# EAGLE board Motor Module V1.2 (EAGLE 6.6.0)
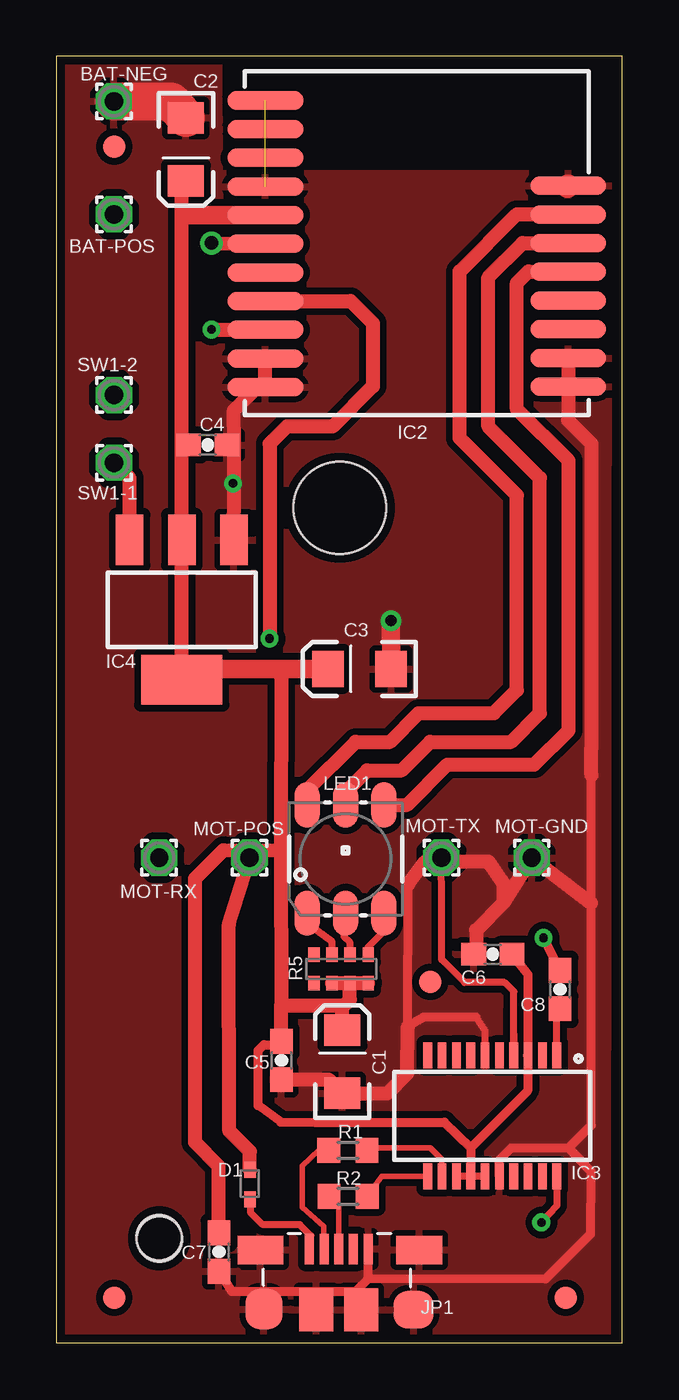
[diagram p0: board, top side]
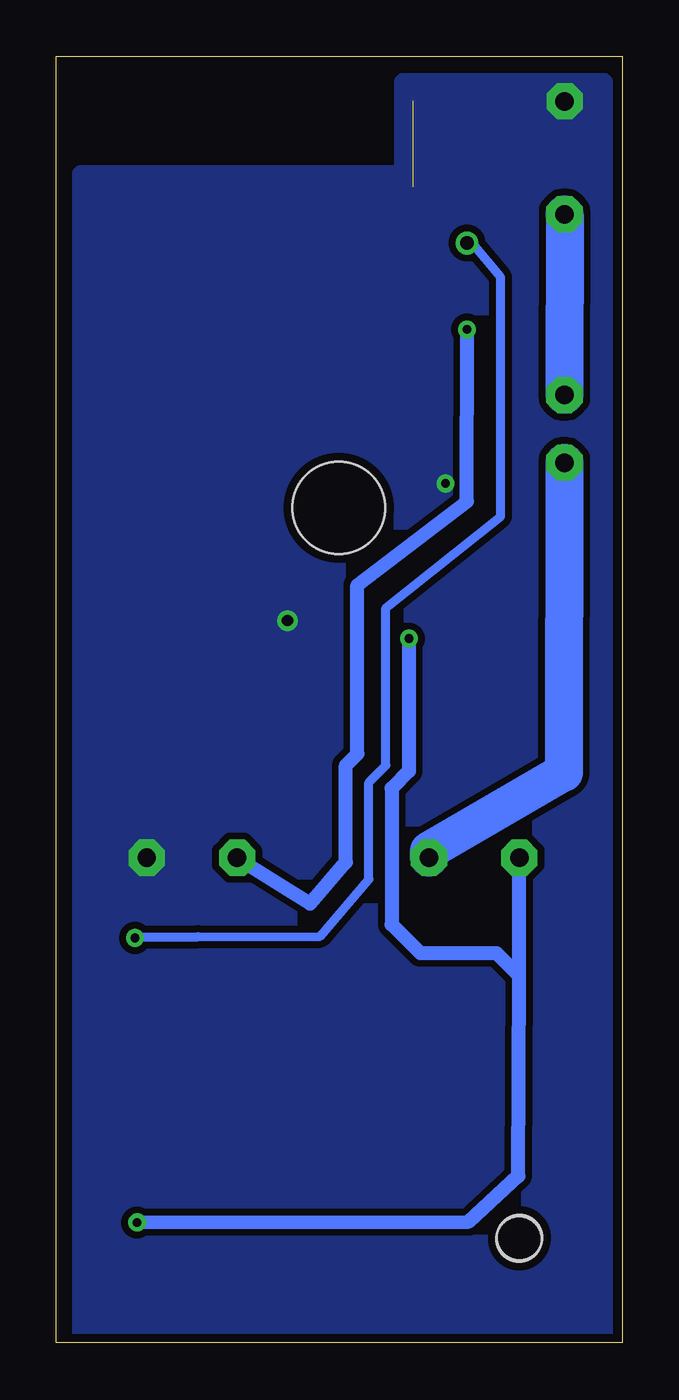
[diagram p1: board, bottom side, seen from below]

Size 25.05 x 57 mm. Coordinates in mm from the lower left corner, seen from the top.
Outline: 0,0 25.05,0 25.05,57 0,57 0,0
Copper layers (1*16): Top 0.035mm / dielectric 1.5mm / Bottom 0.035mm
Design rules "4pcb-Advanced Circuits": minimum track width 10mil, minimum drill 15mil, track to track 8mil, track to pad 8mil, pad to pad 8mil, via to via 8mil, smd to smd 8mil, copper to edge 15mil, drill to drill 8mil, minimum pad ring 10mil, minimum via ring 8mil, stop-mask expansion 4mil, vias tented up to drill 0mil, thermal gap 10mil
Holes 4.1 mm at 12.55,37
Holes 2 mm at 4.55,4.67 4.56,4.6

## Footprints (pad centres in the part's own frame; a part is rotated, then mirrored left to right if it is on the bottom)
1,6/0,8 = drill 0.813 pad 1.6 octagon: 1 0,0
EIA3216 = smd 1.4 x 1.6: A 1.4,0; C -1.4,0
0603-CAP = smd 1.1 x 1: 1 -0.85,0; 2 0.85,0
SOD523 = smd 0.7 x 0.5: A 0.7,0; C -0.6,0
FIDUCIAL-1X2 = smd 1 x 1: 1 0,0
RFD22301 = smd 3.353 x 0.813: 1 0,0; 2 0,-1.27; 3 0,-2.54; 4 0,-3.81; 5 0,-5.08; 6 0,-6.35; 7 0,-7.62; 8 0,-8.89; 9 13.411,-12.675; 10 13.411,-11.405; 11 13.411,-10.135; 12 13.411,-8.865; 13 13.411,-7.595; 14 13.411,-6.325; 15 13.411,-5.055; 16 13.411,-3.785; 17 13.411,-2.515; 18 13.411,-1.245; 19 13.411,0.025
SSOP20_L = smd 0.381 x 1.143: 1 -2.857,-2.68; 2 -2.223,-2.68; 3 -1.587,-2.68; 4 -0.953,-2.68; 5 -0.318,-2.68; 6 0.318,-2.68; 7 0.953,-2.68; 8 1.587,-2.68; 9 2.223,-2.68; 10 2.857,-2.68; 11 2.857,2.68; 12 2.223,2.68; 13 1.587,2.68; 14 0.953,2.68; 15 0.318,2.68; 16 -0.318,2.68; 17 -0.953,2.68; 18 -1.587,2.68; 19 -2.223,2.68; 20 -2.857,2.68
SOT223 = smd 1.219 x 2.235: 1 -2.311,-3.099; 2 0,-3.099; 3 2.311,-3.099 | smd 3.6 x 2.2: 4 0,3.099
USB-MICRO-MOLEX-105017-0001 = smd 0.4 x 1.35: 1 -1.34,1.27; 2 -0.69,1.27; 3 -0.04,1.27; 4 0.61,1.27; 5 1.26,1.27 | smd 2.032 x 1.27: P$1 -3.505,1.219; P$6 3.531,1.219 | smd 1.651 x 1.778: P$2 -3.353,-1.397 | smd 1.5 x 1.9: P$3 -1.04,-1.43; P$4 0.96,-1.43 | smd 1.778 x 1.651: P$5 3.277,-1.422
LED-TRICOLOR-5050 = smd 2 x 1.1: 1 -2.4,1.7; 2 -2.4,0; 3 -2.4,-1.7; 4 2.4,-1.7; 5 2.4,0; 6 2.4,1.7
R0603 = smd 1 x 1.1: 1 -0.85,0; 2 0.85,0
0603-ARV = smd 0.5 x 0.65: 1 -1.2,-0.625; 2 -0.4,-0.625; 3 0.4,-0.625; 4 1.2,-0.625; 5 1.2,0.625; 6 0.4,0.625; 7 -0.4,0.625; 8 -1.2,0.625

## Placement (x,y rotation side)
BAT-NEG  [1,6/0,8]  2.54,55.01 0 top
BAT-POS  [1,6/0,8]  2.55,50.01 0 top
C1  10uF  [EIA3216]  12.66,12.47 90 top
C2  10uF  [EIA3216]  5.73,52.88 270 top
C3  10uF  [EIA3216]  13.42,29.87 180 top
C4  0.1uF  [0603-CAP]  6.7,39.79 0 top
C5  0.1uF  [0603-CAP]  9.96,12.52 270 top
C6  0.1uF  [0603-CAP]  19.33,17.22 180 top
C7  0.1uF  [0603-CAP]  7.19,4.03 270 top
C8  0.1uF  [0603-CAP]  22.31,15.66 90 top
D1  500mA  [SOD523]  8.57,7.07 270 top
FID2  FIDUCIAL1X2  [FIDUCIAL-1X2]  22.55,2 0 top
FID3  FIDUCIAL1X2  [FIDUCIAL-1X2]  2.55,53 0 top
FID4  FIDUCIAL1X2  [FIDUCIAL-1X2]  2.55,2 0 top
FID5  FIDUCIAL1X2  [FIDUCIAL-1X2]  16.55,16 0 top
IC2  RF22301  [RFD22301]  22.67,42.37 180 top
IC3  FTS31XS-U  [SSOP20_L]  19.3,10.06 180 top
IC4  AZ1117CH-3.3TRG1  [SOT223]  5.55,32.48 180 top
JP1  USB-CON-5PIN-105017-0001  [USB-MICRO-MOLEX-105017-0001]  12.54,2.9 0 top
LED1  LED-TRICOLOR-5050NO_IC  [LED-TRICOLOR-5050]  12.8,21.44 90 top
MOT-GND  [1,6/0,8]  21.05,21.5 0 top
MOT-POS  [1,6/0,8]  8.55,21.5 0 top
MOT-RX  [1,6/0,8]  4.55,21.5 0 top
MOT-TX  [1,6/0,8]  17.05,21.5 0 top
R1  27E  [R0603]  12.91,8.54 180 top
R2  27E  [R0603]  12.91,6.5 180 top
R5  330E  [0603-ARV]  12.61,16.57 180 top
SW1-1  [1,6/0,8]  2.55,39 0 top
SW1-2  [1,6/0,8]  2.55,42 0 top

## Library data of the parts
BAT-NEG BAT-POS MOT-GND MOT-POS MOT-RX MOT-TX SW1-1 SW1-2 = wirepad
C1-C3 = SparkFun-Capacitors; PROD_ID: CAP-00811
C4-C8 = SparkFun-Capacitors; PROD_ID: CAP-08604
D1 = diode
FID2-FID5 = SparkFun-Aesthetics
IC2 JP1 = GeekAmmo
IC3 = SparkFun-DigitalIC; PROD_ID: IC-11524
IC4 = SparkFun-PowerIC; PROD_ID: VREG-08170
LED1 = SparkFun-LED
R1 R2 = resistor
R5 = SparkFun-Passives

## Nets
+5V: D1.A JP1.1
+12V: D1.C IC4.3 MOT-POS.1 SW1-1.1
BAT-POS: BAT-POS.1 SW1-2.1
D_N: JP1.2 R1.2
D_P: JP1.3 R2.2
GND: BAT-NEG.1 C1.C C2.C C3.C C4.2 C5.2 C6.2 C7.2 IC2.1 IC2.2 IC2.8 IC2.9 IC2.10 IC2.12 IC2.18 IC2.19 IC3.6 IC3.16 IC4.1 JP1.5 JP1.P$1 JP1.P$2 JP1.P$3 JP1.P$4 JP1.P$5 JP1.P$6 MOT-GND.1
LBLUE: IC2.5 LED1.4
LGREEN: IC2.7 LED1.6
LRED: IC2.6 LED1.5
N$1: C8.1 IC3.1
N$3: LED1.3 R5.1
N$5: LED1.2 R5.2
N$6: LED1.1 R5.3
RST/: C8.2 IC2.14
USB-RX: IC2.17 IC3.4 MOT-TX.1
USB-TX: IC2.16 IC3.20 MOT-RX.1
USB_N: IC3.12 R1.1
USB_P: IC3.11 R2.1
VCC: C1.A C2.A C3.A C4.1 C5.1 C6.1 C7.1 IC2.13 IC3.3 IC3.13 IC3.14 IC3.15 IC4.2 IC4.4 R5.6 R5.7 R5.8

## Tracks (layer width: path | path; a pad name or v marks a point on that pad's centre or on a via)
+5V
  Top 0.254: 11.26,4.76 11.26,4.23 JP1.1
  Top 0.305: 11.26,4.76 10.78,5.24 9.14,5.25 8.6,5.78 8.59,6.35 D1.A
+12V
  Top 0.61: IC4.3 3.24,38.31 SW1-1.1 | D1.C 8.57,8.49 7.66,9.4 7.64,18.54 MOT-POS.1
  Bottom 1.676: SW1-1.1 2.58,25.27 8.55,21.81 MOT-POS.1
BAT-POS
  Bottom 1.676: BAT-POS.1 SW1-2.1
D_N
  Top 0.254: JP1.2 11.84,4.18 11.84,5.18 10.89,6 10.89,7.86 11.62,8.54 R1.2
D_P
  Top 0.254: JP1.3 12.51,6.03 R2.2
GND  (via drill 0.38, 0.5)  (2 unrouted)
  Top 0.305: IC3.6 18.98,13.83 18.58,14.43 | v7.82,38.08 7.79,38.08 7.88,38
  Top 0.406: IC3.16 19.62,8.12 20.14,8.64 22.68,8.64 | 22.68,8.64 23.7,9.65 23.68,19.48 23.7,25.16 | C7.2 7.77,2.29 13.25,2.29 13.8,2.84 | 13.8,2.84 JP1.5 | 13.8,2.84 21.66,2.83 23.65,4.83 23.66,7.62 22.68,8.64 | 18.58,14.43 16.25,14.43 15.56,14.03 15.58,20.33
  Top 0.61: IC2.1 IC2.2 22.67,40.88 23.7,39.85 23.7,26.38 23.69,26.38 23.7,25.16 | 8.93,42.39 7.86,41.31 7.87,39.85 | IC4.1 7.88,38 7.88,38.09 7.87,39.85 | C4.2 7.87,39.85 | C5.2 12.06,11.67 C1.C 14.66,11.07 15.54,11.94 15.56,14.03 | 19.8,19.5 MOT-GND.1 23.68,19.48 | 19.8,19.5 18.58,18.29 18.58,17.33 C6.2 | 15.58,20.33 16.33,21.33 19.13,21.33 19.8,20.36 19.8,19.5 | IC2.19 IC2.18
  Top 0.813: C3.C v14.82,32.01
  Top 1.016: 22.64,51.24 IC2.8
  Top 1.676: BAT-NEG.1 5.07,55.01 C2.C
  Bottom 0.813: v14.82,32.01 14.77,31.97
  pour Bottom (isolate 0.305, rank 6, no thermals): 0.8,-0.51 23.95,-0.51 23.95,51.78 9.69,51.78 9.69,55.85 0.8,55.85
  pour Top (isolate 0.305, rank 6): -0.45,0 24.43,0 24.46,51.82 7.23,51.82 7.2,56.9 -0.45,56.9
LBLUE
  Top 0.61: LED1.4 15.54,23.84 17.31,25.62 21.16,25.62 22.68,27.15 22.68,39.08 20.39,41.37 20.39,46.96 20.9,47.47 22.65,47.47 IC2.5
LGREEN
  Top 0.61: LED1.6 11.1,24.49 13.25,26.64 14.77,26.64 16.04,27.91 19.38,27.91 20.39,28.92 20.39,37.56 17.85,40.1 17.85,47.47 20.39,50.01 22.65,50.01 IC2.7
LRED
  Top 0.61: LED1.5 12.8,24.41 13.76,25.37 15.28,25.37 16.55,26.64 20.14,26.64 21.41,27.91 21.41,38.32 19.12,40.61 19.12,47.21 20.65,48.74 22.65,48.74 IC2.6
N$1
  Top 0.305: IC3.1 22.16,14.67 C8.1
N$3
  Top 0.305: R5.1 13.81,17.54 14.52,18.26 14.52,19.03 LED1.3
N$5
  Top 0.305: R5.2 13.01,17.74 12.74,18 12.74,18.98 LED1.2
N$6
  Top 0.305: R5.3 12.21,17.77 11.22,18.51 11.22,18.93 LED1.1
RST/  (via drill 0.38, 0.6)
  Top 0.406: C8.2 v21.57,17.95
  Top 0.61: v6.87,48.73 IC2.14
  Bottom 0.406: v6.87,48.73 6.65,48.74 5.38,47.21 5.38,36.62 10.46,32.56 10.46,25.59 11.22,24.83 11.22,20.54 13.38,18.02 18.78,18 21.55,17.99 v21.57,17.95
USB-RX  (via drill 0.38)
  Top 0.305: 20.24,14.73 IC3.4 20.25,15.57 19.85,15.97 18.08,15.97 17.06,16.99 17.06,19.49 MOT-TX.1
  Top 0.61: v6.87,44.9 IC2.17
  Bottom 0.61: MOT-TX.1 13.82,19.47 12.23,21.3 12.23,25.59 11.73,26.1 11.73,33.58 6.87,37.28 v6.87,44.9
USB-TX  (via drill 0.38)
  Top 0.305: IC3.20 22.16,6.08 v21.48,5.34
  Top 0.61: IC2.16 13.03,46.16 14.01,45.18 14.01,42.39 12.23,40.61 10.2,40.61 9.44,39.85 v9.44,31.21
  Bottom 0.61: v21.48,5.34 6.79,5.38 4.6,7.4 4.56,16.26 | 4.56,16.26 MOT-RX.1 | v9.44,31.21 9.44,25.34 10.2,24.57 10.2,18.54 8.93,17.27 5.57,17.27 4.56,16.26
USB_N
  Top 0.254: R1.1 13.86,8.64 16.55,8.64 17.06,8.13 17.06,7.87 17.08,7.86 IC3.12
USB_P
  Top 0.254: IC3.11 arc-90 IC3.11 14.42,7.38 R2.1
  Top 0.305: 16.44,7.39 IC3.11
VCC
  Top 0.305: IC3.15 IC3.14 IC3.13
  Top 0.406: C6.1 20.89,16.31 IC3.3 20.87,12.72 20.87,11.18 18.35,8.65 | 9.8,13.21 9.19,13.21 8.93,12.95 8.94,10.52 9.93,9.79 11.42,9.79 17.19,9.78 18.35,8.65 | 18.35,8.65 IC3.14
  Top 0.61: 5.55,39.85 IC4.2 IC4.4 | 5.55,39.85 5.55,50.01 | 5.55,50.01 5.55,51.3 C2.A | R5.6 R5.7 | R5.7 R5.8 | 9.95,29.69 9.93,21.83 | 9.93,21.83 9.95,14.95 | 5.86,49.97 5.55,50.01 | C4.1 5.55,39.85 | 9.95,14.95 12.74,14.95 | 12.74,14.95 13,15.21 13,15.94 R5.7 | 9.95,14.95 C5.1 9.8,13.21 | C1.A 12.66,14.87 12.74,14.95 | C7.1 7.18,7.83 6.14,8.89 6.14,20.57 7.41,21.84 9.93,21.83
  Top 0.813: C3.A 9.95,29.87 | 9.95,29.87 6.04,29.87 IC4.4 | 9.95,29.69 9.95,29.87 | IC2.13 5.86,49.97
  Top 1.016: 6.21,29.36 5.38,29.43 5.63,29.3 IC4.4

## Text on the board
Measures: Motor Module | All measurements in mm